# EAGLE board medi_7_cpx (EAGLE 6.0)

Size 53.34 x 45.72 mm. Coordinates in mm from the lower left corner, seen from the top.
Outline: 0,0 0,45.72 53.34,45.72 53.34,0 0,0
Copper layers (1*16): Top 0.035mm / dielectric 1.5mm / Bottom 0.035mm
Design rules: minimum track width 10mil, minimum drill 24mil, track to track 8mil, track to pad 8mil, pad to pad 8mil, via to via 8mil, smd to smd 8mil, copper to edge 40mil, drill to drill 8mil, minimum pad ring 10mil, minimum via ring 8mil, stop-mask expansion 4mil, vias tented up to drill 0mil, thermal gap 10mil
Holes 3.2 mm at 7.62,7.62 7.62,38.1 45.72,7.62 45.72,38.1

## Footprints (pad centres in the part's own frame; a part is rotated, then mirrored left to right if it is on the bottom)
LED5MM = drill 0.813 octagon: A -1.27,0; K 1.27,0
1X01 = drill 1.016 octagon: 1 0,0

## Placement (x,y rotation side)
00  [LED5MM]  3.81,3.81 0 top
01  [LED5MM]  11.43,3.81 0 top
02  [LED5MM]  19.05,3.81 0 top
03  [LED5MM]  26.67,3.81 0 top
04  [LED5MM]  34.29,3.81 0 top
05  [LED5MM]  41.91,3.81 0 top
06  [LED5MM]  49.53,3.81 0 top
10  [LED5MM]  3.81,11.43 0 top
11  [LED5MM]  11.43,11.43 0 top
12  [LED5MM]  19.05,11.43 0 top
13  [LED5MM]  26.67,11.43 0 top
14  [LED5MM]  34.29,11.43 0 top
15  [LED5MM]  41.91,11.43 0 top
16  [LED5MM]  49.53,11.43 0 top
20  [LED5MM]  3.81,19.05 0 top
21  [LED5MM]  11.43,19.05 0 top
22  [LED5MM]  19.05,19.05 0 top
23  [LED5MM]  26.67,19.05 0 top
24  [LED5MM]  34.29,19.05 0 top
25  [LED5MM]  41.91,19.05 0 top
26  [LED5MM]  49.53,19.05 0 top
30  [LED5MM]  3.81,26.67 0 top
31  [LED5MM]  11.43,26.67 0 top
32  [LED5MM]  19.05,26.67 0 top
33  [LED5MM]  26.67,26.67 0 top
34  [LED5MM]  34.29,26.67 0 top
35  [LED5MM]  41.91,26.67 0 top
36  [LED5MM]  49.53,26.67 0 top
40  [LED5MM]  3.81,34.29 0 top
41  [LED5MM]  11.43,34.29 0 top
42  [LED5MM]  19.05,34.29 0 top
43  [LED5MM]  26.67,34.29 0 top
44  [LED5MM]  34.29,34.29 0 top
45  [LED5MM]  41.91,34.29 0 top
46  [LED5MM]  49.53,34.29 0 top
50  [LED5MM]  3.81,41.91 0 top
51  [LED5MM]  11.43,41.91 0 top
52  [LED5MM]  19.05,41.91 0 top
53  [LED5MM]  26.67,41.91 0 top
54  [LED5MM]  34.29,41.91 0 top
55  [LED5MM]  41.91,41.91 0 top
56  [LED5MM]  49.53,41.91 0 top
H0  [1X01]  19.05,7.62 0 top
H1  [1X01]  21.59,7.62 0 top
H2  [1X01]  24.13,7.62 0 top
H3  [1X01]  26.67,7.62 0 top
H4  [1X01]  29.21,7.62 0 top
H5  [1X01]  31.75,7.62 0 top
H6  [1X01]  34.29,7.62 0 top

## Library data of the parts
00 01-06 10-16 20-26 30-36 40-46 50-56 = led
H0 H1-H6 = pinhead

## Nets
D: 00.A 06.K 11.A 16.K 22.A 26.K 33.A 36.K 44.A 46.K 55.A 56.K H6.1
S0: 00.K 01.A 02.A 03.A 04.A 05.A 06.A 10.K 20.K 30.K 40.K 50.K H0.1
S1: 01.K 10.A 11.K 12.A 13.A 14.A 15.A 16.A 21.K 31.K 41.K 51.K H1.1
S2: 02.K 12.K 20.A 21.A 22.K 23.A 24.A 25.A 26.A 32.K 42.K 52.K H2.1
S3: 03.K 13.K 23.K 30.A 31.A 32.A 33.K 34.A 35.A 36.A 43.K 53.K H3.1
S4: 04.K 14.K 24.K 34.K 40.A 41.A 42.A 43.A 44.K 45.A 46.A 54.K H4.1
S5: 05.K 15.K 25.K 35.K 45.K 50.A 51.A 52.A 53.A 54.A 55.K 56.A H5.1

## Tracks (layer width: path | path; a pad name or v marks a point on that pad's centre or on a via)
D  (12 unrouted)
S0  (12 unrouted)
S1  (12 unrouted)
S2  (12 unrouted)
S3  (12 unrouted)
S4  (12 unrouted)
S5  (12 unrouted)